# Altium PCB PCB_Flex.PcbDoc
Units mil, origin at the board's own origin, x right, y up, seen from the top; angles counter-clockwise.
Board outline 7086.61 x 1102.36 mil, 2 copper layers (Top Layer, Bottom Layer), stack 5.8 mil thick; 2 components, 14 nets, 41 pads, 464 vias.
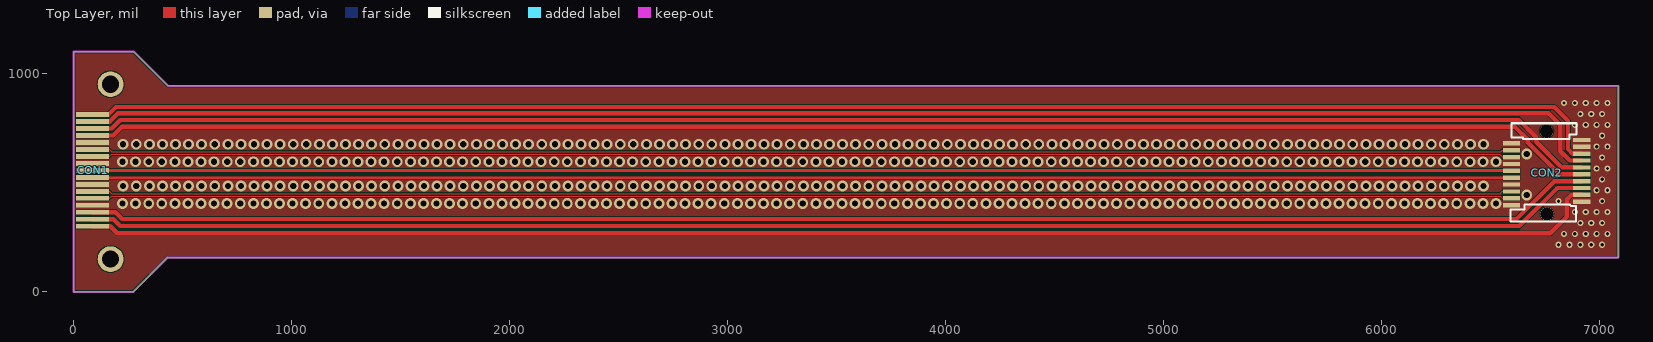
[diagram p0: Top Layer view]
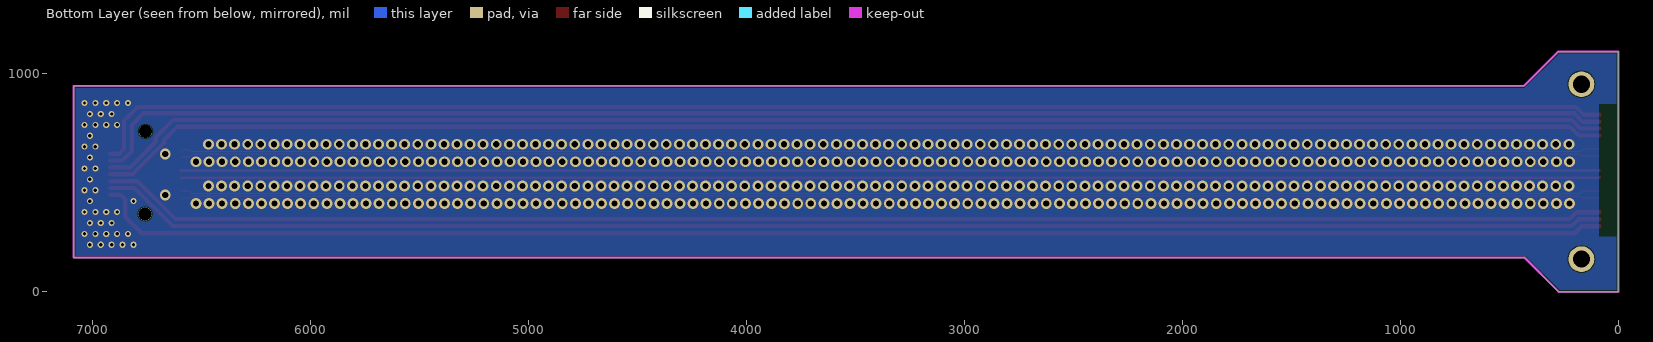
[diagram p1: Bottom Layer view, seen from below]

## Layer stack, top to bottom
Top Solder: solder mask 0.4, Solder Resist, Dk 3.5
Top Layer: signal copper 1.4
Dielectric 1: dielectric 3, FR-4, Dk 3.2
Bottom Layer: signal copper 1.4
Bottom Solder: solder mask 0.4, Solder Resist, Dk 3.5

## Board outline
0,0 0,1102.36 275.59,1102.36 433.07,944.88 7086.61,944.88 7086.61,157.48 431.44,157.48 431.44,157.66 273.78,0

## Design rules (kind name [scope] priority, off if disabled: settings)
Clearance Clearance_nets_poligon [InNamedPolygon('') vs not InNet('GND')] p1: gap=6.5
Clearance Clearance_diff_gnd [(InDifferentialPairClass('All Differential Pairs')) and not (InPadClass('All Pads')) vs InNet('GND')] p2: gap=6.5
Clearance [All] p3: gap=4
DiffPairsRouting [All] p1: maxlimit=6.7 minlimit=6.3 mostfreqgap=6.5 toplayer_minwidth=4.06 toplayer_maxwidth=5.06 toplayer_prefwidth=4.56 bottomlayer_minwidth=4.06 bottomlayer_maxwidth=5.06 bottomlayer_prefwidth=4.56 maxuncoupledlength=500
PolygonConnect [All] p1: connectstyle=Direct reliefconductorwidth=10 reliefentries=4 polygonreliefangle="90 Angle" airgapwidth=10
RoutingVias [All] p1: holewidth=28 width=50 viastyle="Through Hole" minholewidth=10 minwidth=20 maxholewidth=28 maxwidth=50
SolderMaskExpansion [All] p1: expansion=4
Width [All] p1: maxlimit=40 minlimit=10 preferedwidth=10
29 further rules are at their usual default settings.

## Classes and differential pairs
net class RD: RD_N RD_P
net class TD: TD_N TD_P
differential pair RD: +RD_P -RD_N
differential pair TD: +TD_P -TD_N

## Components (designator, comment, footprint, x,y, rotation, side; value= is the part's Value field where it differs from the comment)
CON1 "SFP receptacle (no cage)" "SFP PCB CON" 87,301 r90 top
CON2 "SFP receptacle (no cage, reverse)" "SFP RECEPTACLE (NO CAGE)" 6756.61,736.22 r270 top

## Footprints (in the part's own frame and the unit in brackets; to place one, negate y for a bottom-side part, rotate by r counter-clockwise, add the part's x,y. Pads: shape width x height; smd on the part's side, far side on the other; paste and mask are expansions set on the pad)
"SFP PCB CON" [mil] "SFP connector for flex to rigid PCB solder"
  rect 22x150 smd: 2(0,0) 3(32,0) 4(64,0) 5(416,0) 6(448,0) 7(480,0) 8(512,0) 11(384,0) 12(352,0) 13(320,0) 14(288,0) 15(256,0) 16(224,0) 17(192,0) 18(160,0) 19(128,0) 20(96,0)
"SFP RECEPTACLE (NO CAGE)" [mm]
  rect 0.5x2 smd: 1(1.4,-4.1) 2(2.2,-4.1) 3(3,-4.1) 4(3.8,-4.1) 5(4.6,-4.1) 6(5.4,-4.1) 7(6.2,-4.1) 8(7,-4.1) 9(7.8,-4.1) 10(8.6,-4.1) 11(8.2,4.1) 12(7.4,4.1) 13(6.6,4.1) 14(5.8,4.1) 15(5,4.1) 16(4.2,4.1) 17(3.4,4.1) 18(2.6,4.1) 19(1.8,4.1) 20(1,4.1)
  round 1.55 hole 1.55: 35(9.625,0.05) 36(0,0)
  silkscreen extent -0.95,-4.2 10.5,3.5, body extent -0.67,-4.54 10.33,4.61, height 5.28

## Part data
CON1: library part "SFP connector", "SFP receptacle, woutout cage, standard orientation of SFP module"
CON2: library part "SFP connector reverse", "SFP receptacle, woutout cage, reverse orientation of SFP module"

## Free pads (board coordinates)
  round 118.11 hole 78.74: 1(170,150) 1(170,952.36)

## Via types
v1: diameter 50, hole 28, Top Layer to Bottom Layer, tented both sides, 424 vias
v2: diameter 28, hole 15, Top Layer to Bottom Layer, tented both sides, 40 vias

## Nets (pads, with @x,y where several pads share a name; then routed paths per layer and width w, separated by ;. In a path a pad name is that pad's centre, name@x,y a point inside that pad or via, vN(x,y) a via of type N, cw(c..) or ccw(c..) an arc to the next point about the centre after c; other vN are vias at no path point)
GND: CON1.11 CON1.14 CON1.17 CON1.20 CON2.1 CON2.4 CON2.7 CON2.10 CON2.11 CON2.19 CON2.20
  other v1: 224.86,404.71 284.86,404.71 344.86,404.71 404.86,404.71 464.86,404.71 524.86,404.71 584.86,404.71 644.86,404.71 704.86,404.71 764.86,404.71 824.86,404.71 884.86,404.71 944.86,404.71 1004.86,404.71 1064.86,404.71 1124.86,404.71 1184.86,404.71 1244.86,404.71 1304.86,404.71 1364.86,404.71 1424.86,404.71 1484.86,404.71 1544.86,404.71 1604.86,404.71 1664.86,404.71 1724.86,404.71 1784.86,404.71 1844.86,404.71 1904.86,404.71 1964.86,404.71 2024.86,404.71 2084.86,404.71 2144.86,404.71 2204.86,404.71 2264.86,404.71 2324.86,404.71 2384.86,404.71 2444.86,404.71 2504.86,404.71 2564.86,404.71 2624.86,404.71 2684.86,404.71 2744.86,404.71 2804.86,404.71 2864.86,404.71 2924.86,404.71 2984.86,404.71 3044.86,404.71 3104.86,404.71 3164.86,404.71 3224.86,404.71 3284.86,404.71 3344.86,404.71 3404.86,404.71 3464.86,404.71 3524.86,404.71 3584.86,404.71 3644.86,404.71 3704.86,404.71 3764.86,404.71 3824.86,404.71 3884.86,404.71 3944.86,404.71 4004.86,404.71 4064.86,404.71 4124.86,404.71 4184.86,404.71 4244.86,404.71 4304.86,404.71 4364.86,404.71 4424.86,404.71 4484.86,404.71 4544.86,404.71 4604.86,404.71 4664.86,404.71 4724.86,404.71 4784.86,404.71 4844.86,404.71 4904.86,404.71 4964.86,404.71 5024.86,404.71 5084.86,404.71 5144.86,404.71 5204.86,404.71 5264.86,404.71 5324.86,404.71 5384.86,404.71 5444.86,404.71 5504.86,404.71 5564.86,404.71 5624.86,404.71 5684.86,404.71 5744.86,404.71 5804.86,404.71 5864.86,404.71 5924.86,404.71 5984.86,404.71 6044.86,404.71 6104.86,404.71 6164.86,404.71 6224.86,404.71 6284.86,404.71 6344.86,404.71 6404.86,404.71 6464.86,404.71 6524.86,404.71 6665.7,443.8 227.64,485.29 287.64,485.29 347.64,485.29 407.64,485.29 467.64,485.29 527.64,485.29 587.64,485.29 647.64,485.29 707.64,485.29 767.64,485.29 827.64,485.29 887.64,485.29 947.64,485.29 1007.64,485.29 1067.64,485.29 1127.64,485.29 1187.64,485.29 1247.64,485.29 1307.64,485.29 1367.64,485.29 1427.64,485.29 1487.64,485.29 1547.64,485.29 1607.64,485.29 1667.64,485.29 1727.64,485.29 1787.64,485.29 1847.64,485.29 1907.64,485.29 1967.64,485.29 2027.64,485.29 2087.64,485.29 2147.64,485.29 2207.64,485.29 2267.64,485.29 2327.64,485.29 2387.64,485.29 2447.64,485.29 2507.64,485.29 2567.64,485.29 2627.64,485.29 2687.64,485.29 2747.64,485.29 2807.64,485.29 2867.64,485.29 2927.64,485.29 2987.65,485.29 3047.65,485.29 3107.65,485.29 3167.65,485.29 3227.65,485.29 3287.65,485.29 3347.65,485.29 3407.65,485.29 3467.65,485.29 3527.65,485.29 3587.65,485.29 3647.65,485.29 3707.65,485.29 3767.65,485.29 3827.65,485.29 3887.65,485.29 3947.65,485.29 4007.65,485.29 4067.65,485.29 4127.65,485.29 4187.65,485.29 4247.65,485.29 4307.65,485.29 4367.65,485.29 4427.65,485.29 4487.65,485.29 4547.65,485.29 4607.65,485.29 4667.65,485.29 4727.65,485.29 4787.65,485.29 4847.65,485.29 4907.65,485.29 4967.65,485.29 5027.65,485.29 5087.65,485.29 5147.65,485.29 5207.65,485.29 5267.65,485.29 5327.65,485.29 5387.65,485.29 5447.65,485.29 5507.65,485.29 5567.65,485.29 5627.65,485.29 5687.65,485.29 5747.65,485.29 5807.65,485.29 5867.65,485.29 5927.65,485.29 5987.65,485.29 6047.65,485.29 6107.65,485.29 6167.65,485.29 6227.65,485.29 6287.65,485.29 6347.65,485.29 6407.65,485.29 6467.65,485.29 224.87,596.71 284.87,596.71 344.87,596.71 404.87,596.71 464.87,596.71 524.87,596.71 584.87,596.71 644.87,596.71 704.87,596.71 764.87,596.71 824.87,596.71 884.87,596.71 944.87,596.71 1004.87,596.71 1064.87,596.71 1124.87,596.71 1184.87,596.71 1244.87,596.71 1304.87,596.71 1364.87,596.71 1424.87,596.71 1484.87,596.71 1544.87,596.71 1604.87,596.71 1664.87,596.71 1724.87,596.71 1784.87,596.71 1844.87,596.71 1904.87,596.71 1964.87,596.71 2024.87,596.71 2084.87,596.71 2144.87,596.71 2204.87,596.71 2264.87,596.71 2324.87,596.71 2384.87,596.71 2444.87,596.71 2504.87,596.71 2564.87,596.71 2624.87,596.71 2684.87,596.71 2744.87,596.71 2804.87,596.71 2864.87,596.71 2924.87,596.71 2984.87,596.71 3044.87,596.71 3104.87,596.71 3164.87,596.71 3224.87,596.71 3284.87,596.71 3344.87,596.71 3404.87,596.71 3464.87,596.71 3524.87,596.71 3584.87,596.71 3644.87,596.71 3704.87,596.71 3764.87,596.71 3824.87,596.71 3884.87,596.71 3944.87,596.71 4004.87,596.71 4064.87,596.71 4124.87,596.71 4184.87,596.71 4244.87,596.71 4304.87,596.71 4364.87,596.71 4424.87,596.71 4484.87,596.71 4544.87,596.71 4604.87,596.71 4664.87,596.71 4724.87,596.71 4784.87,596.71 4844.87,596.71 4904.87,596.71 4964.87,596.71 5024.87,596.71 5084.87,596.71 5144.87,596.71 5204.87,596.71 5264.87,596.71 5324.87,596.71 5384.87,596.71 5444.87,596.71 5504.87,596.71 5564.87,596.71 5624.87,596.71 5684.87,596.71 5744.87,596.71 5804.87,596.71 5864.87,596.71 5924.87,596.71 5984.87,596.71 6044.87,596.71 6104.87,596.71 6164.87,596.71 6224.87,596.71 6284.87,596.71 6344.87,596.71 6404.87,596.71 6464.87,596.71 6524.87,596.71 6665.78,632.19 227.64,677.29 287.64,677.29 347.64,677.29 407.64,677.29 467.64,677.29 527.64,677.29 587.64,677.29 647.64,677.29 707.64,677.29 767.64,677.29 827.64,677.29 887.64,677.29 947.64,677.29 1007.64,677.29 1067.64,677.29 1127.64,677.29 1187.64,677.29 1247.64,677.29 1307.64,677.29 1367.64,677.29 1427.64,677.29 1487.64,677.29 1547.64,677.29 1607.64,677.29 1667.64,677.29 1727.64,677.29 1787.64,677.29 1847.64,677.29 1907.64,677.29 1967.64,677.29 2027.64,677.29 2087.64,677.29 2147.64,677.29 2207.64,677.29 2267.64,677.29 2327.64,677.29 2387.64,677.29 2447.64,677.29 2507.64,677.29 2567.64,677.29 2627.64,677.29 2687.64,677.29 2747.64,677.29 2807.64,677.29 2867.64,677.29 2927.64,677.29 2987.65,677.29 3047.65,677.29 3107.65,677.29 3167.65,677.29 3227.65,677.29 3287.65,677.29 3347.65,677.29 3407.65,677.29 3467.65,677.29 3527.65,677.29 3587.65,677.29 3647.65,677.29 3707.65,677.29 3767.65,677.29 3827.65,677.29 3887.65,677.29 3947.65,677.29 4007.65,677.29 4067.65,677.29 4127.65,677.29 4187.65,677.29 4247.65,677.29 4307.65,677.29 4367.65,677.29 4427.65,677.29 4487.65,677.29 4547.65,677.29 4607.65,677.29 4667.65,677.29 4727.65,677.29 4787.65,677.29 4847.65,677.29 4907.65,677.29 4967.65,677.29 5027.65,677.29 5087.65,677.29 5147.65,677.29 5207.65,677.29 5267.65,677.29 5327.65,677.29 5387.65,677.29 5447.65,677.29 5507.65,677.29 5567.65,677.29 5627.65,677.29 5687.65,677.29 5747.65,677.29 5807.65,677.29 5867.65,677.29 5927.65,677.29 5987.65,677.29 6047.65,677.29 6107.65,677.29 6167.65,677.29 6227.65,677.29 6287.65,677.29 6347.65,677.29 6407.65,677.29 6467.65,677.29
  other v2: 6811.61,216.22 6861.61,216.22 6911.61,216.22 6961.61,216.22 7011.61,216.22 6836.61,266.22 6886.61,266.22 6936.61,266.22 6986.61,266.22 7036.61,266.22 6911.61,316.22 6961.61,316.22 7011.61,316.22 6886.61,366.22 6936.61,366.22 6986.61,366.22 7036.61,366.22 6811.61,416.22 7011.61,416.22 6986.61,466.22 7036.61,466.22 7011.61,516.22 6986.61,566.22 7036.61,566.22 7011.61,616.22 6986.61,666.22 7036.61,666.22 7011.61,716.22 6886.61,766.22 6936.61,766.22 6986.61,766.22 7036.61,766.22 6911.61,816.22 6961.61,816.22 7011.61,816.22 6836.61,866.22 6886.61,866.22 6936.61,866.22 6986.61,866.22 7036.61,866.22
LOS: CON1.8 CON2.18 | length 7010.4
  Top Layer w20: CON1.8 159.82,813 194.82,848 6792,848 6855,785 6855,655 6876.14,633.86 CON2.18
MOD_DEF0: CON1.6 CON2.16 | length 6949
  Top Layer w20: CON1.6 175,749 214,788 6630,788 6709.1,708.9 6709.1,688.71 6826.95,570.87 CON2.16
MOD_DEF1: CON1.5 CON2.15 | length 6946.2
  Top Layer w20: CON1.5 182,717 223,758 6610,758 6670,698 6670,685 6815.63,539.37 CON2.15
MOD_DEF2: CON1.4 CON2.14 | length 6915.9
  Top Layer w20: CON1.4 192,365 223,334 6619,334 6792.87,507.87 CON2.14
RATE_SEL: CON1.7 CON2.17 | length 7006.8
  Top Layer w20: CON1.7 166,781 204,819 6766,819 6820,765 6820,645 6862.64,602.36 CON2.17
RD_N: CON1.19 CON2.9 | length 6516.6
  Top Layer w5.06: CON1.19 164.53,429 174.75,439.22 6543.21,439.22 6553.3,429.13 CON2.9
RD_P: CON1.18 CON2.8 | length 6516.5
  Top Layer w5.06: CON1.18 164.53,461 174.75,450.78 6543.45,450.78 6553.3,460.63 CON2.8
TD_N: CON1.12 CON2.2 | length 6515.3
  Top Layer w5.06: CON1.12 164.53,653 174.75,642.78 6546.47,642.78 6553.3,649.61 CON2.2
TD_P: CON1.13 CON2.3 | length 6517.9
  Top Layer w5.06: CON1.13 164.53,621 174.75,631.22 6543,631.22 6556.11,618.11 CON2.3
TX_DISABLE: CON1.3 CON2.13 | length 6916.1
  Top Layer w20: CON1.3 183,333 214,302 6632,302 6806.38,476.38 CON2.13
TX_FAULT: CON1.2 CON2.12 | length 6964.2
  Top Layer w20: CON1.2 168.82,301 200.82,269 6774,269 6850,345 6850,425 6869.88,444.88 CON2.12 CON2.12@6917.91,445
VCCR: CON1.16 CON2.6 | length 6508.8
  Top Layer w12: CON1.16 88.38,523.62 CON2.6
VCCT: CON1.15 CON2.5 | length 6509
  Top Layer w15: CON1.15 6593.31,557 CON2.5
pads on no net: CON2.35 CON2.36

## Polygon pours and split planes (outlines as drawn)
GND on Bottom Layer "Bottom_Layer" (solid, pour order 8): 10,1095 270,1095 430,935 7080,935 7080,165 425,165 270,10 10,10
GND on Top Layer "Top_Leyer_1" (solid, pour order 4): 0,1102.36 275.59,1102.36 433.07,944.88 7086.61,944.88 7086.61,157.48 431.44,157.48 431.26,157.48 273.78,0 0,0

## Keep-outs
Keep-Out Layer:
  lines w10: 431.44,157.48 7086.61,157.48 7086.61,944.88 433.07,944.88 275.59,1102.36 0,1102.36 0,0 273.78,0 431.44,157.66

## Other copper
Top Layer:
  pour cut-out: 88.38,523.62 88.38,555.62 87,557 6593.31,557 6593.31,525.5 6595.2,523.62
Bottom Layer:
  pour cut-out: 0,863 91,863 91,253 0,253

## Silkscreen, mask and mechanical layers (free items; w line width, h text height)
Bottom Solder:
  rectangle: 0,253 91,863
Mechanical 1:
  drawing of 285 lines, arcs and shapes, not listed
  text "Layer" at 855.5,3353.54 h60
  text "Name" at 1265.41,3353.54 h60
  text "Material" at 2195.16,3353.54 h60
  text "Thickness" at 3054.92,3353.54 h60
  text "Constant" at 3704.76,3353.54 h60
  text "Board Layer Stack" at 4274.62,3353.54 h60
  text "1" at 855.5,3233.54 h60
  text "Top Overlay" at 1265.41,3233.54 h60
  text "2" at 855.5,3113.54 h60
  text "Top Solder" at 1265.41,3113.54 h60
  text "Solder Resist" at 2195.16,3113.54 h60
  text "0.40mil" at 3054.92,3113.54 h60
  text "3.5" at 3704.76,3113.54 h60
  text "3" at 855.5,2993.54 h60
  text "Top Layer" at 1265.41,2993.54 h60
  text "Copper" at 2195.16,2993.54 h60
  text "1.40mil" at 3054.92,2993.54 h60
  text "4" at 855.5,2873.54 h60
  text "Dielectric 1" at 1265.41,2873.54 h60
  text "FR-4" at 2195.16,2873.54 h60
  text "3.00mil" at 3054.92,2873.54 h60
  text "3.2" at 3704.76,2873.54 h60
  text "5" at 855.5,2753.54 h60
  text "Bottom Layer" at 1265.41,2753.54 h60
  text "Copper" at 2195.16,2753.54 h60
  text "1.40mil" at 3054.92,2753.54 h60
  text "6" at 855.5,2633.54 h60
  text "Bottom Solder" at 1265.41,2633.54 h60
  text "Solder Resist" at 2195.16,2633.54 h60
  text "0.40mil" at 3054.92,2633.54 h60
  text "3.5" at 3704.76,2633.54 h60
  text "7" at 855.5,2513.54 h60
  text "Bottom Overlay" at 1265.41,2513.54 h60

## Dimensions
0,0 to 273.78,0 on Mechanical 1
0,1102.36 to 275.59,1102.36 on Mechanical 1
170,150 to 87,301 on Mechanical 1
87,813 to 170,952.36 on Mechanical 1
170,150 to 0,0 on Mechanical 1
0,1102.36 to 170,952.36 on Mechanical 1
0,0 to 170,150 on Mechanical 1
170,952.36 to 0,1102.36 on Mechanical 1
0,1102.36 to 0,0 on Mechanical 1